# Altium PCB LightRelay.PcbDoc
Units mil, origin at the board's own origin, x right, y up, seen from the top; angles counter-clockwise.
Board outline 3250 x 1690 mil, 2 copper layers (Top Layer, Bottom Layer); 11 components, 7 nets, 39 pads, 0 vias.
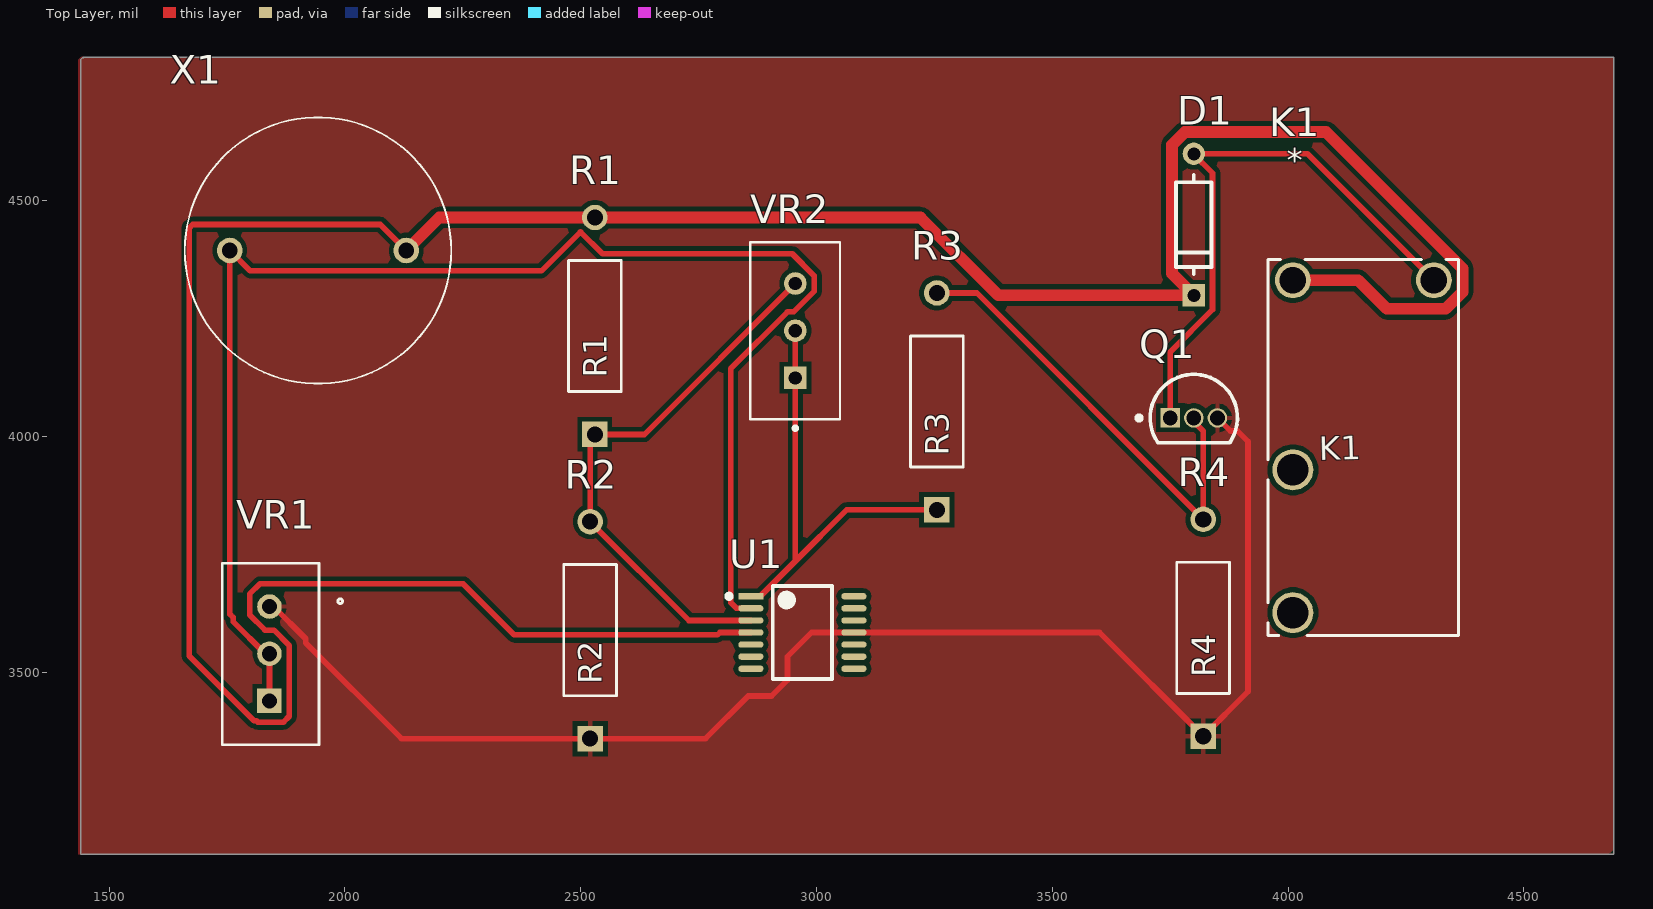
[diagram p0: Top Layer view]
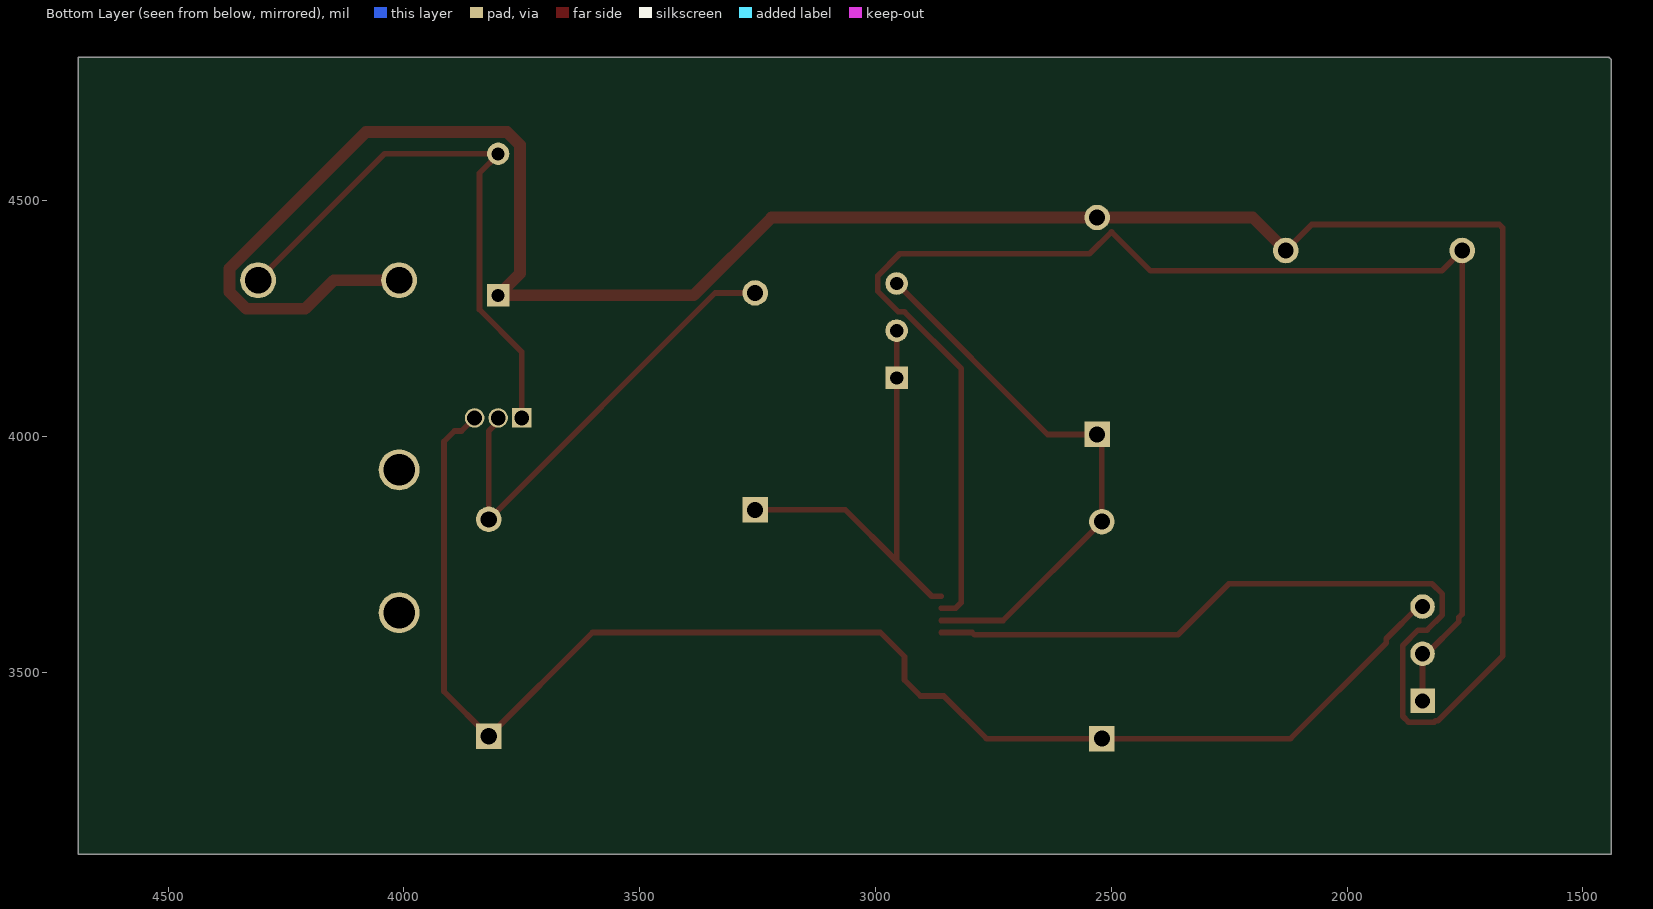
[diagram p1: Bottom Layer view, seen from below]
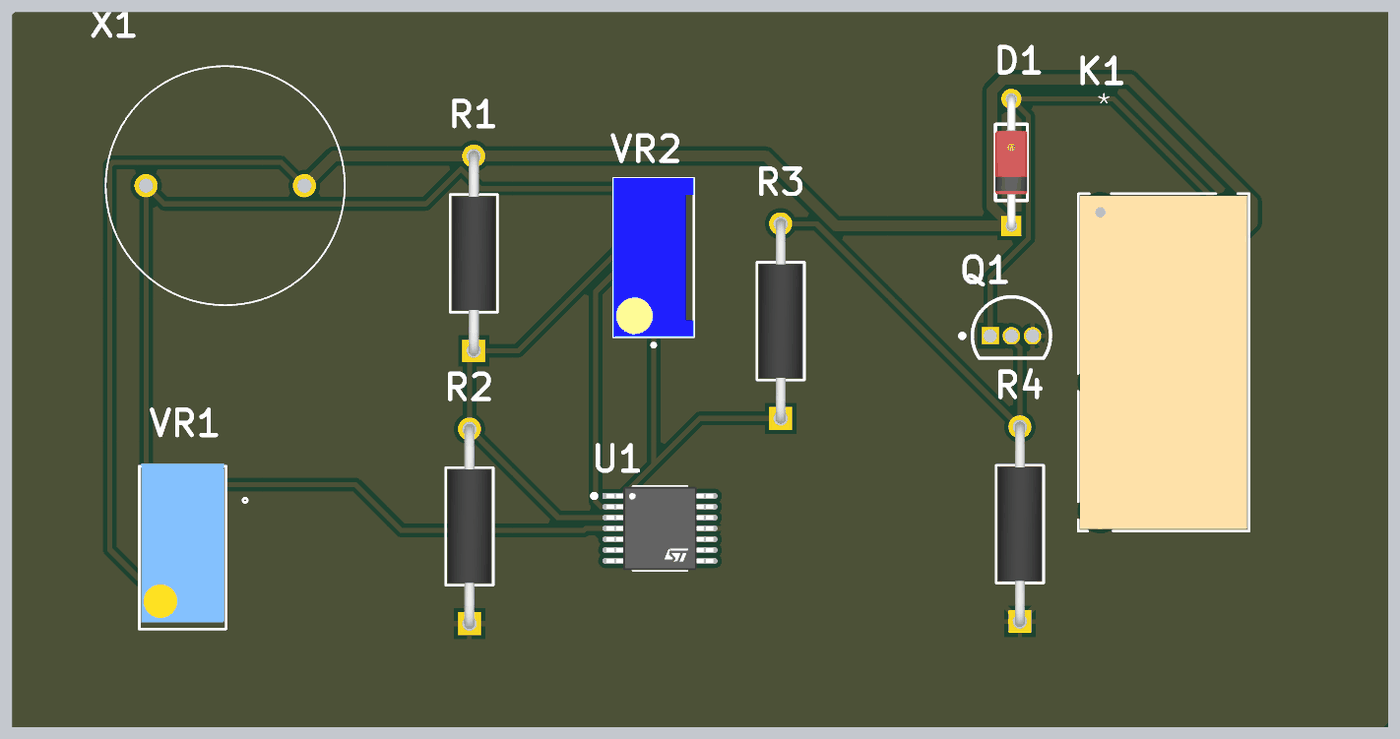
[diagram p2: 3D render of the assembled board from above, using the file's embedded part models]

## Layer stack, top to bottom
Top Solder: solder mask 0.4, Solder Resist, Dk 3.5
Top Layer: signal copper 1.4
Dielectric 1: dielectric 12.6, FR-4, Dk 4.8
Bottom Layer: signal copper 1.4
Bottom Solder: solder mask 0.4, Solder Resist, Dk 3.5

## Board outline
1445,4804.78 1440,4799.78 1440,3115 4690,3115 4690,4805

## Design rules (kind name [scope] priority, off if disabled: settings)
Clearance Q1_pads [InComponent('Q1') vs InComponent('Q1')] p1: gap=8 ignorepadtopadclearanceinfootprint=FALSE
Clearance [All] p2: gap=10 ignorepadtopadclearanceinfootprint=FALSE
MinimumSolderMaskSliver Q1 [InComponent('Q1') vs InComponent('Q1')] p1: minsoldermaskwidth=8
MinimumSolderMaskSliver [All] p2: minsoldermaskwidth=10
PolygonConnect [All] p1: connectstyle=Relief reliefconductorwidth=10 reliefentries=4 polygonreliefangle="90 Angle" airgapwidth=10
RoutingVias [All] p1: holewidth=28 width=50 viastyle="Through Hole" minholewidth=28 minwidth=50 maxholewidth=28 maxwidth=50
SilkToSolderMaskClearance [IsPad] p1: minsilkscreentomaskgap=0.25 clearancetoexposedcopper=TRUE
SolderMaskExpansion [All] p1: expansion=0 istentingtop=FALSE
SupplyNets "Schematic Supply Nets_1" [InNet('GND')] p1: voltage=0.000
SupplyNets "Schematic Supply Nets" [InNet('+12V')] p2: voltage=0.000
Width POWER [InNet('+12V')] p1: maxlimit=30 minlimit=10 preferedwidth=25
Width [All] p2: maxlimit=15 minlimit=10 preferedwidth=12
28 further rules are at their usual default settings.

## Classes and differential pairs
component class Lightrelayproject: D1 K1 Q1 R2 R3 R4 U1 VR1 X1

## Components (designator, comment, footprint, x,y, rotation, side; value= is the part's Value field where it differs from the comment)
D1 "1N4148" FP-017AG-MFG 3800,4450 r90 top
K1 "PCH-112L2M" RELAY_PCH-1A_TYC 4010,4332 r0 top
Q1 "BC547B" ONSC-TO-92-3-29-11 3800,4040 r0 top
R1 "Resistor" YAG_CFR25_YAG 2530,4005 r90 top value=10K
R2 "Resistor" YAG_CFR25_YAG 2520,3360 r90 top value=10K
R3 "Resistor" YAG_CFR25_YAG 3255,3845 r90 top value=1K
R4 "Resistor" YAG_CFR25_YAG 3820,3365 r90 top value=10K
U1 "LM324PT" FP-TSSOP14-IPC_C 2970,3585 r0 top
VR1 "3296W-1-203LF" POT_3296W 1840,3440 r90 top
VR2 "3296W-1-473LF" TRIM_3296W-1-473LF 2955,4225 r90 top
X1 "NORPS-12" NORPS12 1755.98,4395 r0 top

## Footprints (in the part's own frame and the unit in brackets; to place one, negate y for a bottom-side part, rotate by r counter-clockwise, add the part's x,y. Pads: shape width x height; smd on the part's side, far side on the other; paste and mask are expansions set on the pad)
FP-017AG-MFG [mm]
  rect 1.2x1.2 hole 0.7 paste-2539.97 mask+0: 1(-3.813,0)
  round 1.2 hole 0.7 paste-2539.97 mask+0: 2(3.813,0)
  silkscreen extent -2.68,-0.95 2.68,0.95, body extent -4.51,-1.05 4.51,1.05, height 0.25
FP-TSSOP14-IPC_C [mm]
  rect 1.355x0.341 smd paste+0 mask+0: 1(-2.775,1.95)
  rrect100% 1.355x0.341 smd paste+0 mask+0: 2(-2.775,1.3) 3(-2.775,0.65) 4(-2.775,0) 5(-2.775,-0.65) 6(-2.775,-1.3) 7(-2.775,-1.95) 8(2.775,-1.95) 9(2.775,-1.3) 10(2.775,-0.65) 11(2.775,0) 12(2.775,0.65) 13(2.775,1.3) 14(2.775,1.95)
  silkscreen extent -4.08,-2.5 1.6,2.5, body extent -3.55,-2.6 3.55,2.6, height 0.25
NORPS12 [mm]
  round 1.381 hole 0.85: 1(0,0) 2(9.5,0)
  silkscreen extent -2.42,-7.17 11.93,7.17
ONSC-TO-92-3-29-11 [mm] "TO, 3-Leads, Body Dia 4.7mm, Pitch 1.27mm"
  rect 1.05x1.05 hole 0.8: 1(-1.27,0)
  round 1.05 hole 0.8: 2(0,0) 3(1.27,0)
  silkscreen extent -3.07,-1.34 2.35,2.35, body extent -2.35,-1.33 2.36,2.36, height 7.87
POT_3296W [mil]
  round 52 / inner round 60 / far side round 52 hole 32 paste-99999 mask+0: 1(200,0) 2(100,0)
  rect 52x52 / inner round 60 / far side rect 52x52 hole 32 paste-99999 mask+0: 3(0,0)
  silkscreen extent -93,-155 292,100, body extent -77,-100 298,95, height 378
RELAY_PCH-1A_TYC [mil]
  round 76 hole 56 paste-99999 mask+0: 1(0,0) 6(299,0)
  round 87 hole 67 paste-99999 mask+0: 2(0,-402) 3(0,-705)
  silkscreen extent -52,-753 352,44, body extent -47,-748 346,39, height 598
TRIM_3296W-1-473LF [mm]
  rect 1.218x1.218 / inner round 1.218 / far side rect 1.218x1.218 hole 0.71: 1(-2.54,0)
  round 1.218 hole 0.71: 2(0,0) 3(2.54,0)
  silkscreen extent -5.35,-2.41 4.76,2.42, body extent -4.76,-2.41 4.76,2.42, height 11.55
YAG_CFR25_YAG [mil]
  rect 54x54 hole 34 paste-99999 mask+0: 1(0,0)
  round 54 hole 34 paste-99999 mask+0: 2(460,0)
  silkscreen extent 91,-56 369,56, body extent -12,-51 472,51, height 102

## Part data
D1: library part CMP-07163-000046-1, "DIODE GEN PURP 100V 200MA DO35", Average Rectified Current=200mA, Capacitance=4pF, Case/Package=DO-35, Current=4A, Forward Current=300mA, Forward Voltage=1V, Max Forward Surge Current (Ifsm)=1A, Max Operating Temperature=175°C, Max Power Dissipation=500mW, Max Repetitive Reverse Voltage (Vrrm)=100V, Max Reverse Current=5uA, Min Operating Temperature=-65°C, Package Quantity=2000, Contact Plating=Tin, Current Rating=200mA, Diameter=1.91mm, Element Configuration=Single, Height=4.56mm, Lead Free="Lead Free", Length=4.56mm, Max Reverse Voltage (DC)=100V, Max Surge Current=4A, Mount="Through Hole", Number of Pins=2, Output Current=200mA, Outside Diameter=1.85mm, Packaging=Bulk, Peak Non-Repetitive Surge Current=4A, Polarity=Standard, Power Dissipation=500mW, Radiation Hardening=No, REACH SVHC="No SVHC", Recovery Time=4ns, Reverse Recovery Time=4ns, Reverse Voltage=100V, Series=-, Voltage=100V, Voltage Rating (DC)=100V, Weight=0.01lb, Width=1.91mm
K1: "Description", Manufacturer_Name="TE Connectivity", Copyright="Copyright (C) 2025 Ultra Librarian. All rights reserved.", Manufacturer_Part_Number=PCH-112L2M, RefDes=RefDes, Type=Type
Q1: library part CMP-1048-01467-1, "Amplifier Transistor, NPN Silicon, 3-Pin TO-92, Bulk Box", Manufacturer="On Semiconductor", ComponentLink1Description="Manufacturer URL", ComponentLink1URL=http://www.onsemi.com/, ComponentLink2Description=Datasheet, ComponentLink2URL=http://www.onsemi.com/pub_link/Collateral/BC546-D.PDF, ComponentLink3Description="Package Specification", ComponentLink3URL=http://www.onsemi.cn/pub_link/Collateral/2N6426-D.PDF, DatasheetVersion="Rev. 7", fT Min (MHz)=150, IC Continuous (A)=0.1, Mounting Technology="Through Hole", PackageDescription="3-Pin Transistor Outline, Body 4.825 x 3.685 mm, Pitch 1.27 mm", PackageReference=TO-92-3-29-11_AM_SL, PackageVersion="Rev. AM", Packing="Bulk Box", PartNumber=BC547B, Polarity=NPN, RoHS=FALSE
U1: library part CMP-12131-000012-2, "IC OPAMP GP 4 CIRCUIT 14TSSOP", Case/Package=TSSOP, Dual Supply Voltage=9V, Input Bias Current=150nA, Input Offset Voltage (Vos)=7mV, Input Offset Voltage-Max=2mV, Max Dual Supply Voltage=15V, Max Operating Temperature=70°C, Max Supply Voltage=30V, Min Dual Supply Voltage=1.5V, Min Operating Temperature=0°C, Min Supply Voltage=3V, Nominal Supply Current=1.2mA, Operating Supply Current=1.5mA, Output Current=40mA, Output Current per Channel=70mA, Package Quantity=2500, Voltage Gain=100dB, Amplifier Type="GENERAL PURPOSE", Bandwidth=1.3MHz, Common Mode Rejection Ratio=70dB, Contact Plating=Gold, Gain Bandwidth Product=1.3MHz, Height=1mm, Lead Free="Lead Free", Length=5mm, Mount="Surface Mount", Number of Amplifiers=4, Number of Channels=4, Number of Circuits=4, Number of Elements=4, Number of Pins=14, Operating Supply Voltage=15V, Packaging="Tape and Reel", Radiation Hardening=No, REACH SVHC="No SVHC", RoHS Compliant=Yes, Series=-, Slew Rate=0.4V/µs, Slew Rate-Nom=0.4V/µs, Supply Current=1.2mA, Technology=BIPOLAR, Unity Gain Bandwidth Product=1.3MHz, Width=4.4mm
VR1: "Description", Manufacturer_Name="Bourns Electronics", Copyright="Copyright (C) 2025 Ultra Librarian. All rights reserved.", Manufacturer_Part_Number=3296W-1-203LF
VR2: "47 kOhms 0.5W, 1/2W PC Pins Through Hole Trimmer Potentiometer Cermet 25.0 Turn Top Adjustment", Package="NON STANDARD-3 Bourns", Check_prices=https://www.snapeda.com/parts/3296W-1-473LF/Bourns/view-part/?ref=eda, MF=Bourns, MP=3296W-1-473LF, SnapEDA_Link=https://www.snapeda.com/parts/3296W-1-473LF/Bourns/view-part/?ref=snap
X1: "ADVANCED PHOTONIX - NORPS-12 - LIGHT DEPENDENT RESISTOR,1MOHM,250MW", Manufacturer_Name="ADVANCED PHOTONIX", Mouser Part Number=846-NORPS-12, Datasheet Link=https://componentsearchengine.com/Datasheets/2/NORPS-12.pdf, Geometry.Height=7mm, Manufacturer_Part_Number=NORPS-12, Mouser Price/Stock=https://www.mouser.co.uk/ProductDetail/Advanced-Photonix/NORPS-12?qs=tlsG%2FOw5FFjcOb820GAJtg%3D%3D
R1 R2 R3 R4: SimulationGenericComponent=True, TC1=0, TC2=0

## Nets (pads, with @x,y where several pads share a name; then routed paths per layer and width w, separated by ;. In a path a pad name is that pad's centre, name@x,y a point inside that pad or via, vN(x,y) a via of type N, cw(c..) or ccw(c..) an arc to the next point about the centre after c; other vN are vias at no path point)
+12V: D1.1 K1.1 R1.2 U1.4 X1.2 | length 6394.2
  Top Layer w12: X1.2 2075,4450 1677.03,4450 1670,4442.97 1670,3535.37 1807.37,3398 1812,3398 1815,3395 1869.63,3395 1882,3407.37 1882,3557.4 1849.4,3590 1830.6,3590 1798,3622.6 1798,3666.59 1819.91,3688.5 2250.71,3688.5 2359.21,3580 2790,3580 2795,3585 U1.4
  Top Layer w25: X1.2 2200,4465 R1.2 3220.3,4465 3385.3,4300 3799.88,4300 D1.1 3753.88,4346 3753.88,4619.22 3780.9,4646.24 4080.32,4646.24 4369.5,4357.06 4369.5,4306.94 4334.06,4271.5 4209.18,4271.5 4148.68,4332 K1.1
BASE: Q1.2 R3.2 R4.2 | length 987.1
  Top Layer w12: R3.2 3340,4305 R4.2 3820,4012.06 3800,4032.06 Q1.2
COLL: D1.2 K1.6 Q1.1 | length 1233.7
  Top Layer w12: Q1.1 3750,4180.01 3839.62,4269.63 3839.62,4559.01 3800,4598.63 D1.2 4040.88,4600.12 K1.6
COMP_OUT: R3.1 U1.1 VR2.1 VR2.2 | length 959.1
  Top Layer w12: U1.1 2880.7,3661.77 2955,3736.07 ; VR2.2 VR2.1 2955,3736.07 ; R3.1 3063.93,3845 2955,3736.07
GND: Q1.3 R2.1 R4.1 U1.11 VR1.1 | length 3064.6
  Top Layer w12: VR1.1 1848.89,3640 1917,3571.89 1917,3563 2120,3360 R2.1 2764.58,3360 2855.1,3450.52 2904.6,3450.52 2938.41,3484.32 2938.41,3533.82 2989.58,3585 U1.11 3600,3585 R4.1 3915,3460 3915,3990 3892.81,4012.19 3877.81,4012.19 Q1.3
V1: R1.1 R2.2 U1.3 VR2.3 | length 1174.2
  Top Layer w12: U1.3 2729.38,3610.62 R2.2 2520,3995 R1.1 2635,4005 VR2.3
V2: U1.2 VR1.2 VR1.3 X1.1 | length 3146.5
  Top Layer w12: VR1.3 VR1.2 1831.11,3540 1763,3608.11 1763,3617 1755.98,3624.02 X1.1 1799.17,4351.81 2416.81,4351.81 2499.59,4434.59 2546.11,4388.08 2948.46,4388.08 2994.98,4341.56 2994.98,4308.44 2951.51,4264.98 2938.44,4264.98 2818.05,4144.59 2818.05,3648.44 2830.04,3636.45 2860.46,3636.45 U1.2
pads on no net: K1.2 K1.3 U1.5 U1.6 U1.7 U1.8 U1.9 U1.10 U1.12 U1.13 U1.14

## Polygon pours and split planes (outlines as drawn)
GND on Top Layer "GND_L01_P000" (solid, pour order 0): 1440,4810 1445,4805 4690,4805 4690,3125 4680,3115 1435,3115 1435,4800 1440,4805

## Text inside footprints (layer, text, board x,y; h text height)
K1: Top 3D Body "*" at 3997.5,4484 h50; Top Overlay "*" at 3997.5,4562 h50